# Altium PCB PCB1.PcbDoc
Units mm, origin at the board's own origin, x right, y up, seen from the top; angles counter-clockwise.
Board outline 20.95 x 31.75 mm, 2 copper layers (Top Layer, Bottom Layer); 20 components, 7 nets, 44 pads, 1 vias.
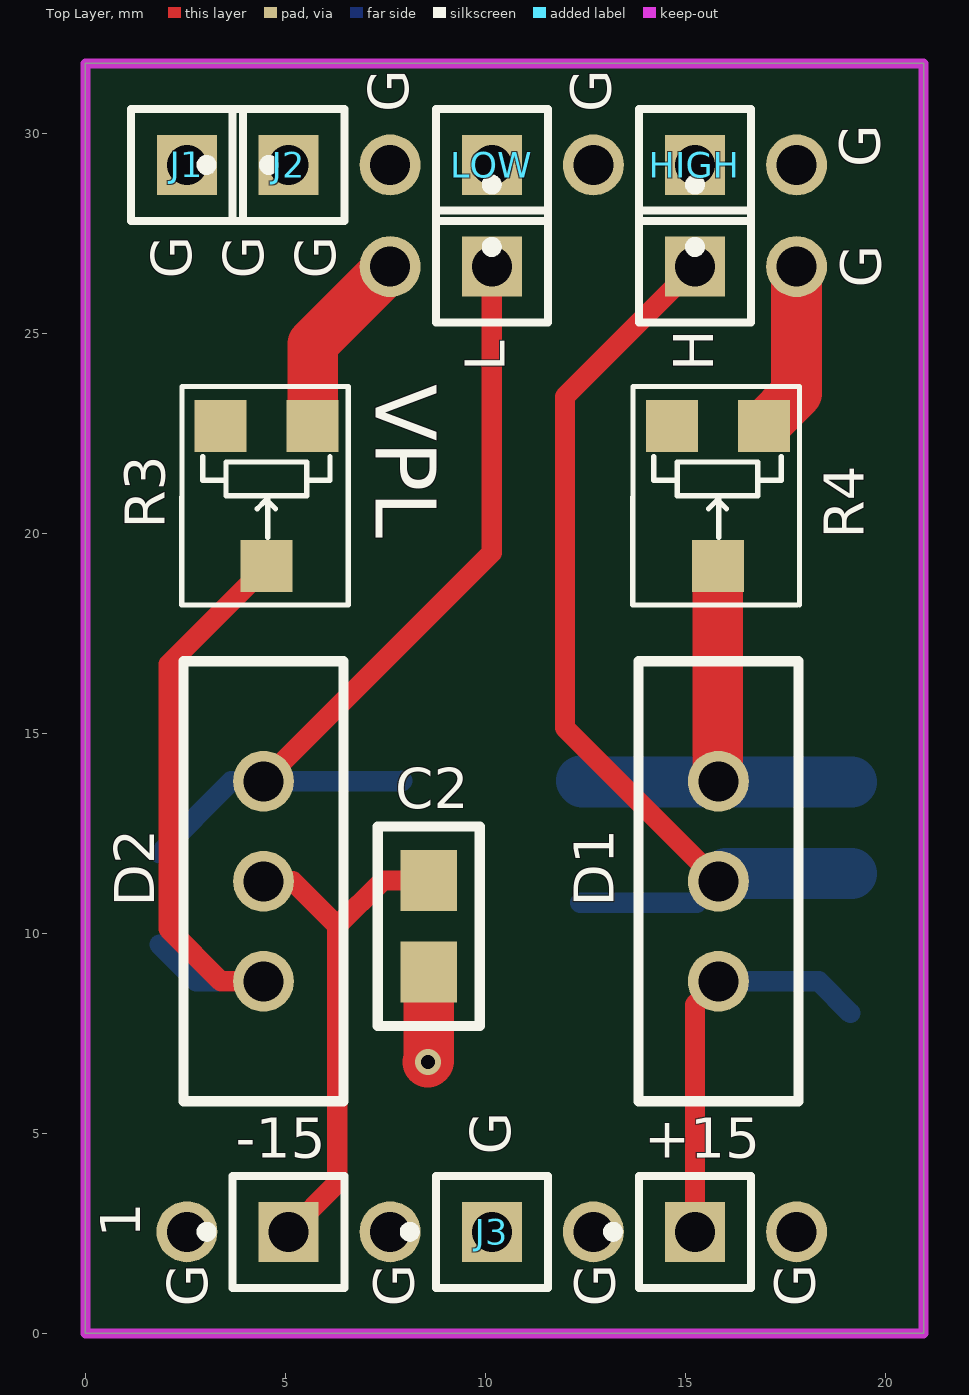
[diagram p0: Top Layer view]
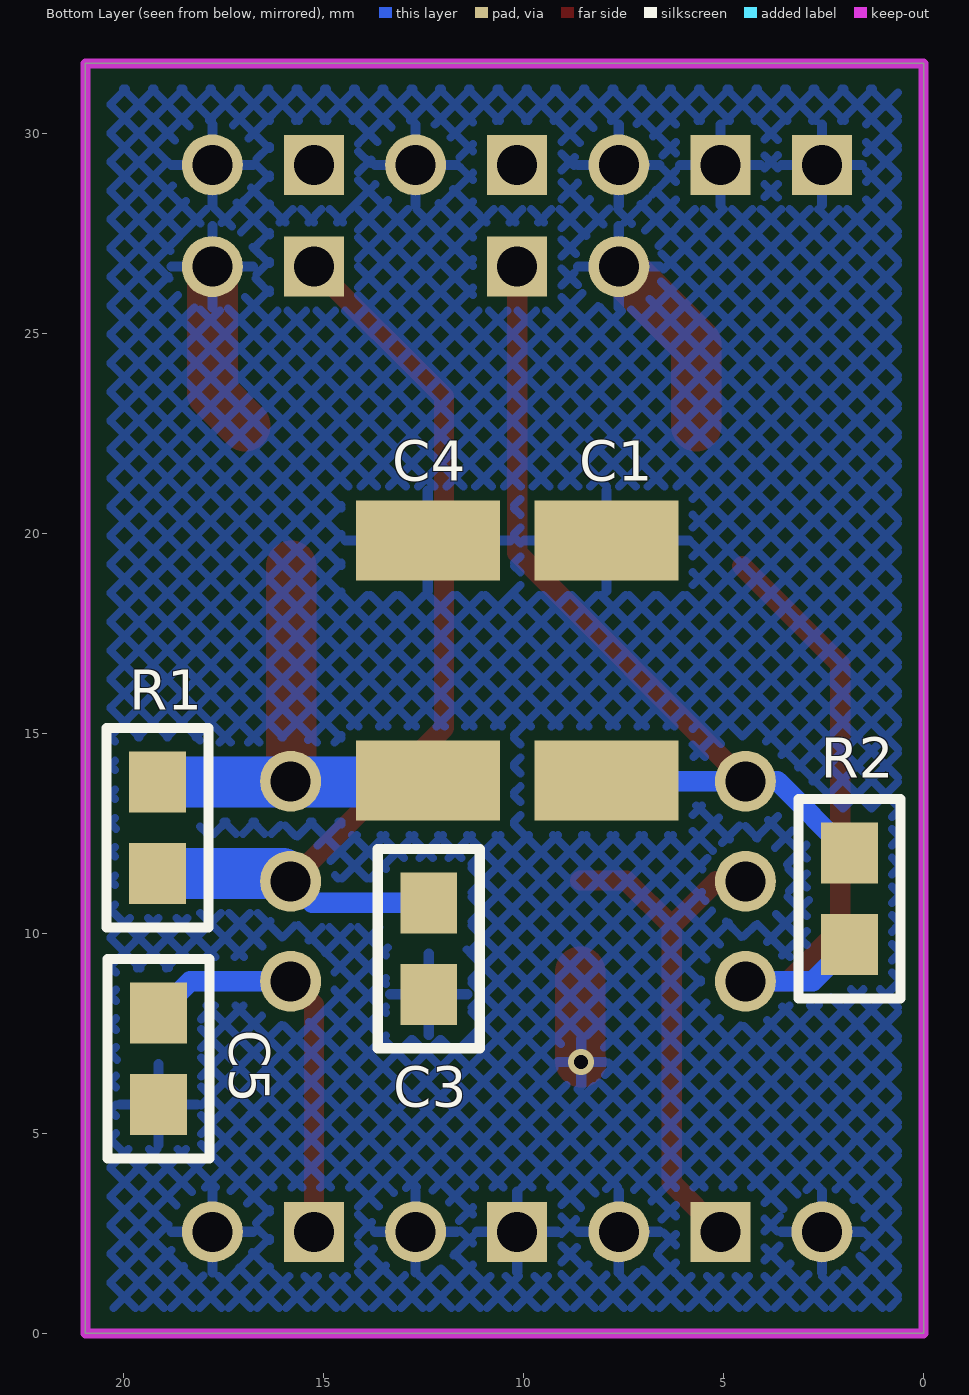
[diagram p1: Bottom Layer view, seen from below]

## Layer stack, top to bottom
Top Solder: solder mask 0.0102, Solder Resist, Dk 3.5
Top Layer: signal copper 0.0356
Dielectric 1: dielectric 0.32, FR-4, Dk 4.8
Bottom Layer: signal copper 0.0356
Bottom Solder: solder mask 0.0102, Solder Resist, Dk 3.5

## Board outline
0,0 20.955,0 20.955,31.75 0,31.75

## Design rules (kind name [scope] priority, off if disabled: settings)
Clearance [All] p1: gap=0.254
PolygonConnect [All] p1: connectstyle=Relief reliefconductorwidth=0.254 reliefentries=4 polygonreliefangle="90 Angle" airgapwidth=0.254
RoutingVias [All] p1: holewidth=0.711 width=1.27 viastyle="Through Hole" minholewidth=0.711 minwidth=1.27 maxholewidth=0.711 maxwidth=1.27
SolderMaskExpansion [All] p1: expansion=0.102
Width [All] p1: maxlimit=1.5 minlimit=0.254 preferedwidth=0.254
29 further rules are at their usual default settings.

## Components (designator, comment, footprint, x,y, rotation, side; value= is the part's Value field where it differs from the comment)
+15 "IN" PIN1 15.24,2.54 r90 top
-15 "Socket" PIN1 5.08,2.54 r90 top
C1 "10,0" Cap_BIG 9.83,12.725 r180 bottom
C2 "1,0" CAP_SMALL 9.855,7.671 r90 top
C3 "1,0" CAP_SMALL 11.1,7.112 r90 bottom
C4 "10,0" Cap_BIG 14.3,12.725 r180 bottom
C5 "0,1" CAP_SMALL 20.396,9.373 r270 bottom
D1 "LM317 (POZITIVE)" TO-220 15.824,11.303 r270 top
D2 "LM337 (NEGATIVE)" TO-220 4.453,11.303 r90 top
H "IN" PIN1 15.24,26.67 r0 top (schematic designator H_IN)
HIGH "IN" PIN1 15.24,29.21 r180 top
J1 "GND" PIN1 2.54,29.21 r270 top
J2 "GND" PIN1 5.08,29.21 r90 top
J3 "GND" PIN1 10.16,2.54 r90 top
L "IN" PIN1 10.16,26.67 r0 top (schematic designator L_IN)
LOW "IN" PIN1 10.16,29.21 r180 top
R1 "240" RES 20.396,10.16 r180 bottom
R2 "120" RES 3.099,8.382 r180 bottom
R3 "5k" PODSR_RES 4.547,20.853 r180 top
R4 "5k" PODSR_RES 15.824,20.853 r180 top

## Footprints (in the part's own frame and the unit in brackets; to place one, negate y for a bottom-side part, rotate by r counter-clockwise, add the part's x,y. Pads: shape width x height; smd on the part's side, far side on the other; paste and mask are expansions set on the pad)
Cap_BIG [mm] "FROM_MAX"
  rect 3.6x2 smd: 1(1.905,7.092) 2(1.905,1.092)
  body extent 0,-0.01 3.81,8.19, height 2.54
CAP_SMALL [mil] "FROM_MAX"
  rect 60x55.98 smd: 1(53.71,50) 2(143.71,50)
  silkscreen extent 1,0 197,100, body extent 20,18 178,82, height 100
PIN1 [mm] "Connector; Plug"
  rect 1.5x1.5 hole 1: 1(0,0)
  silkscreen extent -1.4,-1.4 1.4,2.17
PODSR_RES [mm] "PODSR_RES"
  rect 1.3x1.3 smd: 1(-1.136,-1.83) 2(0.014,1.67) 3(1.164,-1.83)
  silkscreen extent -2.03,-2.82 2.14,2.64
RES [mil] "FROM_MAX"
  rect 55.98x60 smd: 1(49,52.71) 2(49,142.71)
  silkscreen extent -1,0 99,196, body extent 17,19 81,177, height 100
TO-220 [mil]
  round 60 hole 39.37: 1(-98.43,0) 2(0,0) 3(98.43,0)
  silkscreen extent -217,-79 217,79

## Part data
+15 H HIGH J1 J2 J3 L LOW: library part Socket, "Socket"
C1 C4: library part CAP_BIG
C2 C3 C5: library part CAP_SMALL
R1 R2: library part RES
R3 R4: library part RES_PODSTR

## Free pads (board coordinates)
  round 1.524 hole 1: 1(2.54,2.54) 1(7.62,2.54) 1(7.62,26.67) 1(7.62,29.21) 1(12.7,2.54) 1(12.7,29.21) 1(17.78,2.54) 1(17.78,26.67) 1(17.78,29.21)

## Via types
v1: diameter 0.65, hole 0.35, Top Layer to Bottom Layer, 1 vias

## Nets (pads, with @x,y where several pads share a name; then routed paths per layer and width w, separated by ;. In a path a pad name is that pad's centre, name@x,y a point inside that pad or via, vN(x,y) a via of type N, cw(c..) or ccw(c..) an arc to the next point about the centre after c; other vN are vias at no path point)
GND: C1.1 C2.1 C3.1 C4.1 C5.2 J1.1 J2.1 J3.1 pad.1 R3.1 R4.1 | length 11.4
  Top Layer w1.27: R3.1 5.683,24.733 pad.1@7.62,26.67 ; v1(8.56,6.782) 8.585,6.807 C2.1 ; R4.1 17.78,23.503 pad.1@17.78,26.67
Net+15_1: +15.1 C5.1 D1.3 | length 10.1
  Top Layer w0.508: +15.1 15.24,8.219 D1.3
  Bottom Layer w0.508: D1.3 18.332,8.803 C5.1
Net-15_1: -15.1 C2.2 D2.2 | length 13.2
  Top Layer w0.508: D2.2 5.182,11.303 6.299,10.185 ; -15.1 6.299,3.759 6.299,10.185 ; C2.2 7.435,11.321 6.299,10.185
NetC1_2: C1.2 D2.3 L.1 R2.2 | length 22.1
  Top Layer w0.508: D2.3 10.16,19.51 L.1
  Bottom Layer w0.508: R2.2 3.65,13.803 D2.3 7.91,13.803 C1.2
NetC3_2: C3.2 D1.2 H.1 R1.1 | length 25.4
  Top Layer w0.508: H.1 11.989,23.419 11.989,15.138 D1.2
  Bottom Layer w0.508: C3.2 15.283,10.762 D1.2
  Bottom Layer w1.27: D1.2 16.02,11.499 R1.1
NetC4_2: C4.2 D1.1 R1.2 R4.2 | length 12.2
  Top Layer w1.27: R4.2 15.81,13.817 D1.1
  Bottom Layer w1.27: C4.2 12.428,13.785 R1.2
NetD2_1: D2.1 R2.1 R3.2 | length 16
  Top Layer w0.508: D2.1 3.389,8.803 2.083,10.109 2.083,16.734 R3.2
  Bottom Layer w0.508: R2.1 2.772,8.803 D2.1
pads on no net: HIGH.1 LOW.1 R3.3 R4.3

## Polygon pours and split planes (outlines as drawn)
GND on Bottom Layer "Top Layer-No Net" (hatched 45Degree grid 0.508 track 0.203, remove dead copper, pour order 2): 0.635,31.115 0.635,0.635 20.32,0.635 20.32,31.115 0.635,31.115

## Keep-outs
Keep-Out Layer:
  the board outline again, w0.254

## Silkscreen, mask and mechanical layers (free items; w line width, h text height)
Top Overlay:
  text "G" at 8.077,30.531 h1 r90
  text "G" at 13.132,30.531 h1 r90
  text "G" at 19.863,29.159 h1 r90
  text "G" at 2.642,26.365 h1 r90
  text "G" at 4.445,26.365 h1 r90
  text "G" at 6.248,26.365 h1 r90
  text "G" at 19.888,26.137 h1 r90
  text "VPL" at 7.264,23.724 h1.52 r270
  text "G" at 10.617,4.47 h1 r90
  text "1" at 1.372,2.388 h1 r90
  text "G" at 3.048,0.66 h1 r90
  text "G" at 8.204,0.66 h1 r90
  text "G" at 13.233,0.66 h1 r90
  text "G" at 18.237,0.66 h1 r90